# Altium PCB StereoJackToDualDifferential.PcbDoc
Units mm, origin at the board's own origin, x right, y up, seen from the top; angles counter-clockwise.
Board outline 44.45 x 63.5 mm, 2 copper layers (Top Layer, Bottom Layer); 30 components, 22 nets, 85 pads, 8 vias.
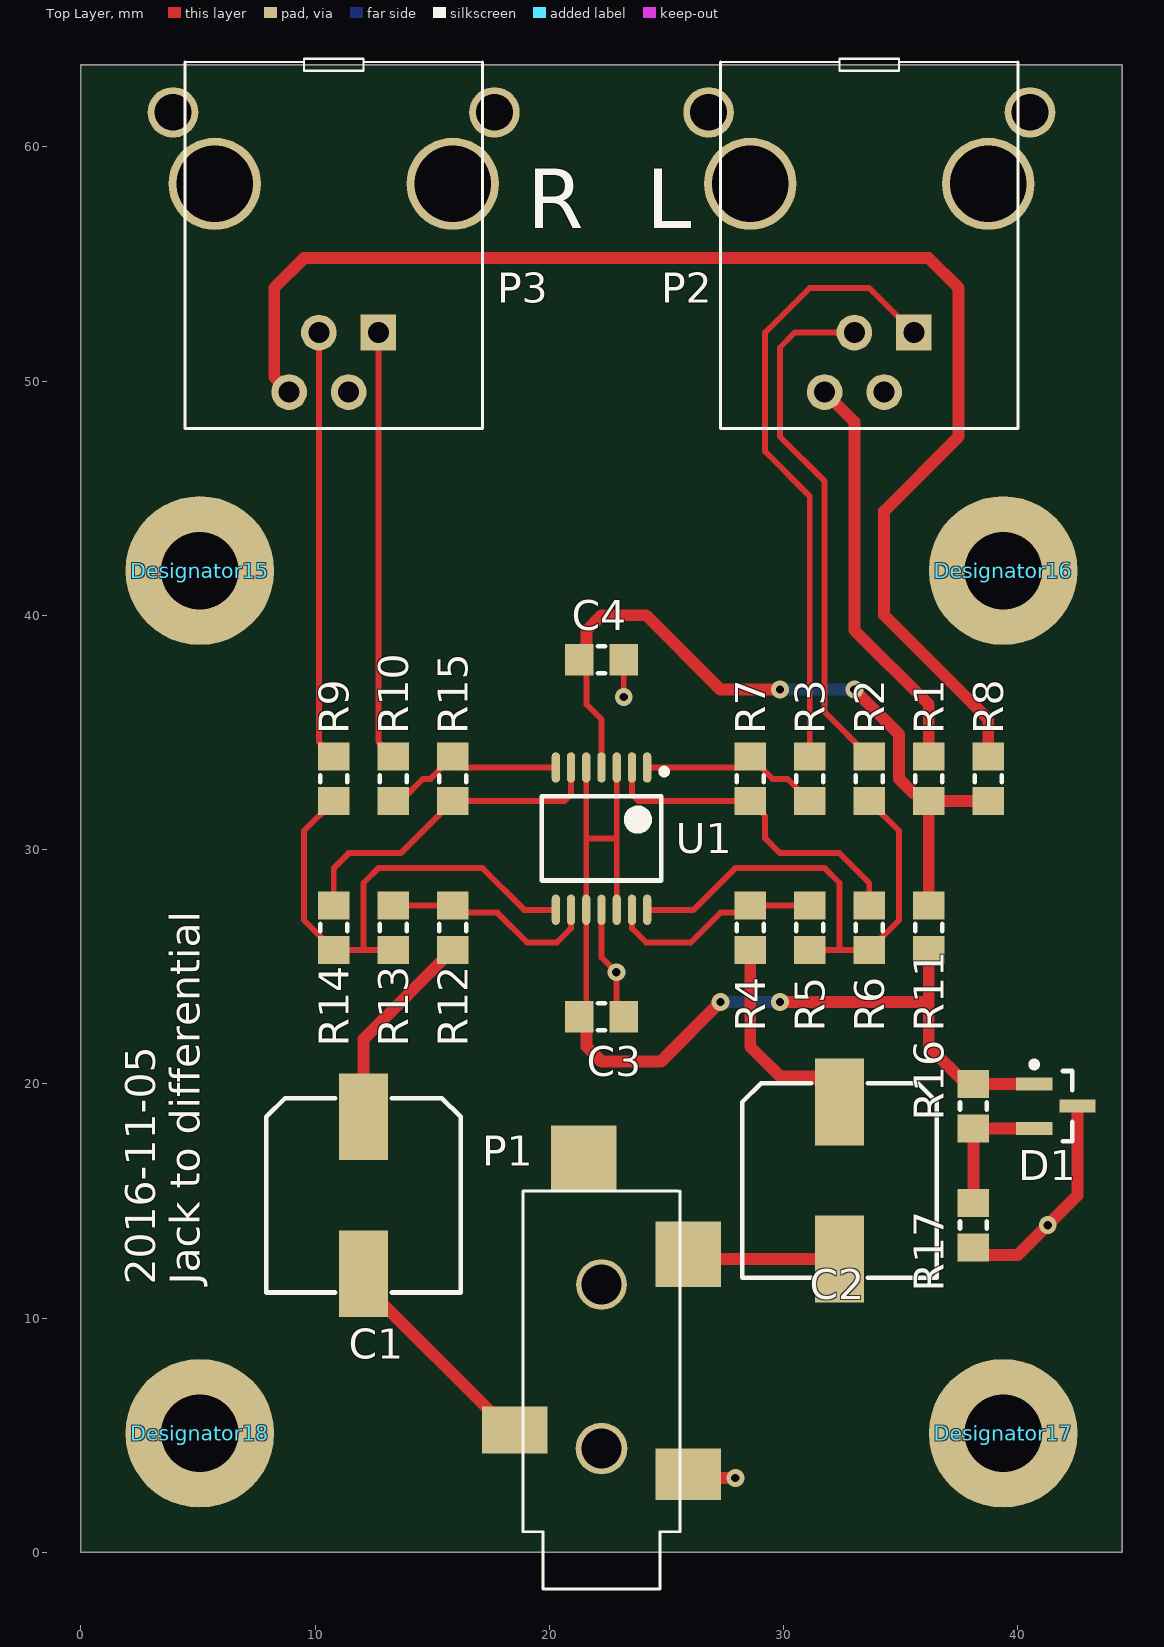
[diagram p0: Top Layer view]
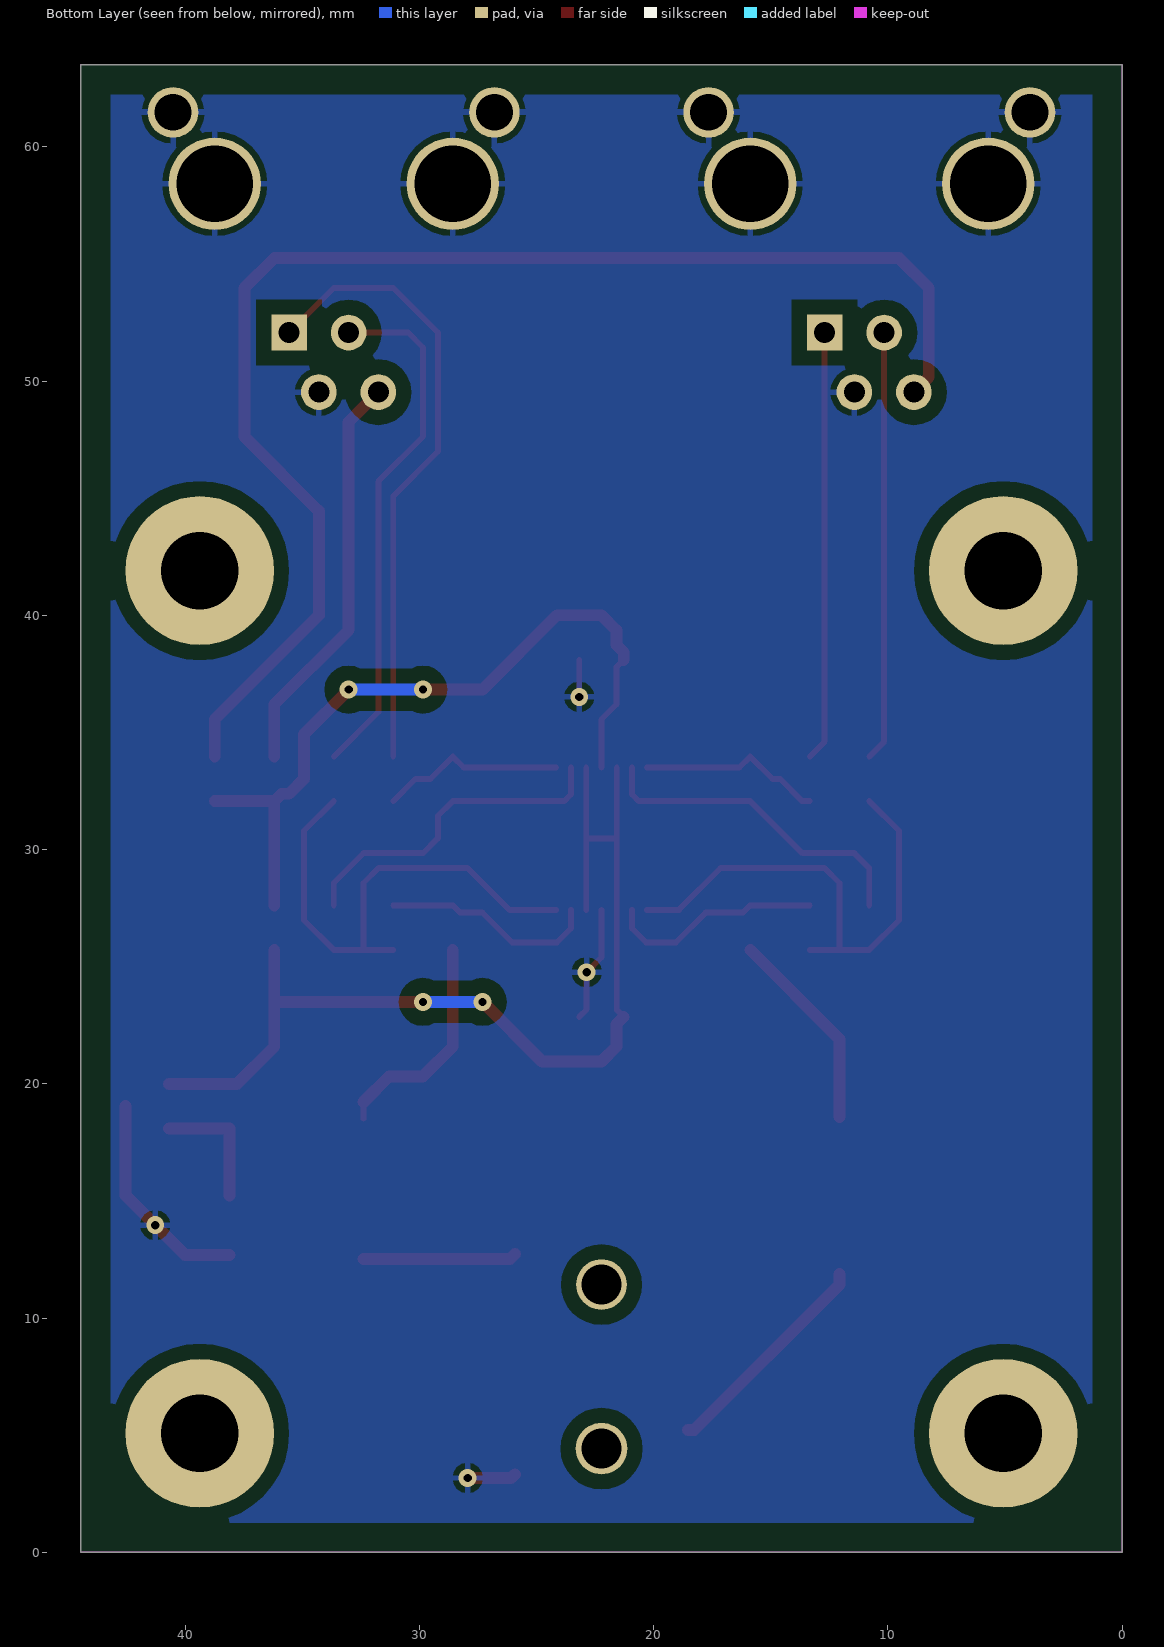
[diagram p1: Bottom Layer view, seen from below]

## Layer stack, top to bottom
Top Solder: solder mask 0.0102, Solder Resist, Dk 3.5
Top Layer: signal copper 0.0356
Dielectric 1: dielectric 0.32, FR-4, Dk 4.8
Bottom Layer: signal copper 0.0356
Bottom Solder: solder mask 0.0102, Solder Resist, Dk 3.5

## Board outline
0,0 44.45,0 44.45,63.5 0,63.5

## Design rules (kind name [scope] priority, off if disabled: settings)
Clearance Clearance_1 [InPoly] p1: gap=0.635
Clearance [All] p2: gap=0.203
PolygonConnect [All] p1: connectstyle=Relief reliefconductorwidth=0.254 reliefentries=4 polygonreliefangle="90 Angle" airgapwidth=0.254
RoomDefinition StereoJackToDualDifferential [InComponentClass('StereoJackToDualDifferential')] p1: confinementstyle=ConfineIn formatcopy=TRUE lockcomponents=FALSE outline 84.328,-36.703 254,-36.703 254,-13.716 84.328,-13.716
RoutingVias [All] p1: holewidth=0.711 width=1.27 viastyle="Through Hole" minholewidth=0.711 minwidth=1.27 maxholewidth=0.711 maxwidth=1.27
SolderMaskExpansion [All] p1: expansion=0.102
Width [All] p1: maxlimit=1.27 minlimit=0.254 preferedwidth=0.508 minimp=50.000000 maximp=50.000000 favimp=50.000000
29 further rules are at their usual default settings.

## Classes and differential pairs
component class StereoJackToDualDifferential: C1 C2 C3 C4 D1 P1 P2 P3 R1 R2 R3 R4 R5 R6 R7 R8 R9 R10 R11 R12 R13 R14 R15 R16 R17 U1

## Components (designator, comment, footprint, x,y, rotation, side; value= is the part's Value field where it differs from the comment)
C1 "Capacitor_Polarized" CAP_RAD_SMD_DIA315 12.065,15.24 r270 top
C2 "Capacitor_Polarized" CAP_RAD_SMD_DIA315 32.385,15.875 r270 top
C3 "Capacitor" 0805 22.225,22.86 r0 top
C4 "Capacitor" 0805 22.225,38.1 r0 top
D1 "TL431" SOT23_132 41.62,19.05 r0 top
Designator15 "Comment" SCREW_4_40 5.08,41.91 r0 top
Designator16 "Comment" SCREW_4_40 39.37,41.91 r0 top
Designator17 "Comment" SCREW_4_40 39.37,5.08 r0 top
Designator18 "Comment" SCREW_4_40 5.08,5.08 r0 top
P1 "CON_AUDIO_3.5mm_TRS_ALT1" "CONN_3.5mm_CUI 3523-SMT" 22.225,-0.07 r90 top
P2 "CON6_5555140-2" CONN4_5555140-2 33.655,58.42 r180 top
P3 "CON6_5555140-2" CONN4_5555140-2 10.795,58.42 r180 top
R1 "Resistor" 0805 36.195,33.02 r270 top
R2 "Resistor" 0805 33.655,33.02 r90 top
R3 "Resistor" 0805 31.115,33.02 r90 top
R4 "Resistor" 0805 28.575,26.67 r270 top
R5 "Resistor" 0805 31.115,26.67 r90 top
R6 "Resistor" 0805 33.655,26.67 r90 top
R7 "Resistor" 0805 28.575,33.02 r90 top
R8 "Resistor" 0805 38.735,33.02 r270 top
R9 "Resistor" 0805 10.795,33.02 r90 top
R10 "Resistor" 0805 13.335,33.02 r90 top
R11 "Resistor" 0805 36.195,26.67 r90 top
R12 "Resistor" 0805 15.875,26.67 r270 top
R13 "Resistor" 0805 13.335,26.67 r90 top
R14 "Resistor" 0805 10.795,26.67 r90 top
R15 "Resistor" 0805 15.875,33.02 r90 top
R16 "Resistor" 0805 38.1,19.05 r90 top
R17 "Resistor" 0805 38.1,13.97 r90 top
U1 "OPA_QUAD" TSSOP14 22.225,30.48 r270 top

## Footprints (in the part's own frame and the unit in brackets; to place one, negate y for a bottom-side part, rotate by r counter-clockwise, add the part's x,y. Pads: shape width x height; smd on the part's side, far side on the other; paste and mask are expansions set on the pad)
0805 [mm] "Chip Resistor, 2-Leads, Body 2,0x1,3mm, IPC Medium Density"
  rect 1.2x1.35 smd: 1(-0.95,0) 2(0.95,0)
  silkscreen extent -0.15,-0.58 0.15,0.58, body extent -1.1,-0.67 1.1,0.67, height 0.65
CAP_RAD_SMD_DIA315 [mm] "Aluminum Electrolytic Capacitor, 8mm diameter"
  rect 3.7x2.1 smd: +(-3.35,0) -(3.35,0)
  silkscreen extent -4.15,-4.15 4.15,4.15, body extent -3.97,-3.99 4,3.99, height 6
CONN4_5555140-2 [mil] "5555140-2 (shielded) ou 5555165-2 (unshielded)"
  rect 60x60 hole 35.04 mask+4.72: 1(-75,250)
  round 60 hole 35.04 mask+4.72: 2(-25,350) 3(25,250) 4(75,350)
  round 85 hole 61.81 mask+4.72: M(-270.08,-120.08) M(270.08,-120.08)
  round 155 hole 127.95 mask+4.72: M(-200,0) M(200,0)
  silkscreen extent -250,-210 250,411, body extent -309,-320 311,409, height 537
"CONN_3.5mm_CUI 3523-SMT" [mm] "Right-angle, surface-mounted 3.5mm connector TRRS"
  rect 2.2x2.8 smd mask+0.12: 1(3.4,-3.7)
  rect 2.8x2.8 smd mask+0.12: 2(12.8,-3.7) 4(16.9,0.75)
  rect 2x2.8 smd mask+0.12: 3(5.3,3.7)
  rrect100% 2.2x2.2 hole 1.7 mask+0.02: ""(4.5,0)
  rrect100% 2.159x2.159 hole 1.7 mask+0.02: ""(11.5,0)
  silkscreen extent -1.5,-3.35 15.5,3.35, body extent -1.5,-4.5 15.5,4.5, height 5
SCREW_4_40 [mil]
  rrect100% 250x250 hole 130 mask+0.79: 1(0,0)
SOT23_132 [mm] "SOT23, 3-Leads, Body 3,0x2,6mm (max), Pitch 0,95mm, IPC Medium Density"
  rect 1.55x0.55 smd: 1(-0.925,0.95) 2(-0.925,-0.95) 3(0.925,0)
  silkscreen extent -1.05,-1.5 0.7,1.9, body extent -0.7,-1.5 0.7,1.5, height 1.2
TSSOP14 [mm]
  oval 1.3x0.35 smd mask+0.06: 1(-3.025,1.95) 2(-3.025,1.3) 3(-3.025,0.65) 4(-3.025,0) 5(-3.025,-0.65) 6(-3.025,-1.3) 7(-3.025,-1.95) 8(3.05,-1.95) 9(3.05,-1.3) 10(3.05,-0.65) 11(3.05,0) 12(3.05,0.65) 13(3.05,1.3) 14(3.05,1.95)
  silkscreen extent -2.97,-2.55 1.8,2.8, body extent -2.25,-2.55 2.25,2.55, height 1.2

## Part data
C1 C2: "Capacitor"
P1: "Audio 3.5mm CUI SJ-3523-SMT-TR"
P2 P3: "6p4c RJ11/RJ14, shielded (5555165-2 unshielded)"
U1: "Quad amplifier (standard)"

## Via types
v1: diameter 0.762, hole 0.356, Top Layer to Bottom Layer, 8 vias

## Nets (pads, with @x,y where several pads share a name; then routed paths per layer and width w, separated by ;. In a path a pad name is that pad's centre, name@x,y a point inside that pad or via, vN(x,y) a via of type N, cw(c..) or ccw(c..) an arc to the next point about the centre after c; other vN are vias at no path point)
+5V: C4.1 R1.2 R8.2 R11.2 U1.4 | length 32.6
  Top Layer w0.254: C4.1 21.59,37.785 21.59,36.195 22.225,35.56 U1.4
  Top Layer w0.508: C4.1 21.275,38.42 21.59,38.735 21.59,39.37 22.225,40.005 24.13,40.005 27.305,36.83 v1(29.845,36.83) ; v1(33.02,36.83) 34.925,34.925 34.925,33.02 35.56,32.385 35.88,32.385 R1.2 ; R11.2 R1.2 ; R8.2 R1.2
  Bottom Layer w0.508: v1(29.845,36.83) v1(33.02,36.83)
GND: C3.2 C4.2 D1.3 P1.1 P2.2 P2.M P3.2 P3.M R17.1 U1.11 | length 17.9
  Top Layer w0.254: U1.11 22.225,25.4 v1(22.86,24.765) 22.86,23.175 C3.2 ; v1(23.175,36.515) C4.2
  Top Layer w0.508: P1.1 26.08,3.175 v1(27.94,3.175) ; R17.1@38.1,12.7 40.005,12.7 42.545,15.24 D1.3
  other v1: 41.275,13.97
LEFT_IN: C2.+ R4.2 | length 9.5
  Top Layer w0.254: C2.+@32.385,18.51 C2.+@32.385,19.05
  Top Layer w0.508: R4.2 28.575,21.59 29.845,20.32 31.29,20.32 C2.+
NetC1_-: C1.- P1.3 | length 9.5
  Top Layer w0.508: C1.- 12.065,11.43 18.265,5.23 P1.3
NetC2_-: C2.- P1.2 | length 6.5
  Top Layer w0.508: P1.2 26.13,12.525 C2.-
NetD1_2: D1.2 R16.1 R17.2 | length 5.5
  Top Layer w0.508: R17.2@38.1,15.235 R16.1 D1.2
NetP2_1: P2.1 R3.2 | length 26.8
  Top Layer w0.254: R3.2 31.115,45.085 29.21,46.99 29.21,52.07 31.115,53.975 33.655,53.975 P2.1
NetP2_3: P2.3 R2.2 | length 22.5
  Top Layer w0.254: P2.3 30.48,52.07 29.845,51.435 29.845,47.625 31.75,45.72 31.75,35.875 R2.2
NetP2_4: P2.4 R1.1 | length 17.4
  Top Layer w0.508: P2.4 33.02,48.26 33.02,39.37 36.195,36.195 R1.1
NetP3_1: P3.1 R10.2 | length 18.4
  Top Layer w0.254: P3.1 12.7,34.605 R10.2
NetP3_3: P3.3 R9.2 | length 18.4
  Top Layer w0.254: P3.3 10.16,34.605 R9.2
NetP3_4: P3.4 R8.1 | length 58.1
  Top Layer w0.508: P3.4 8.255,50.165 8.255,53.975 9.525,55.245 36.195,55.245 37.465,53.975 37.465,47.625 34.29,44.45 34.29,40.005 38.735,35.56 R8.1
NetR2_1: R2.1 R5.1 R6.1 U1.14 | length 22
  Top Layer w0.254: U1.14 26.16,27.43 27.94,29.21 31.75,29.21 32.385,28.575 32.385,25.72 ; R5.1 32.385,25.72 ; R2.1 34.925,30.8 34.925,26.99 R6.1 32.385,25.72
NetR3_1: R3.1 R7.2 U1.1 | length 7.9
  Top Layer w0.254: U1.1 28.11,33.505 R7.2 29.525,33.02 30.165,33.02 R3.1
NetR4_1: R4.1 R5.2 U1.13 | length 9.3
  Top Layer w0.254: U1.13 23.525,26.64 24.13,26.035 26.035,26.035 27.305,27.305 28.26,27.305 R4.1 R5.2
NetR6_2: R6.2 R7.1 U1.2 | length 14.4
  Top Layer w0.254: U1.2 23.525,32.355 23.81,32.07 R7.1 29.21,31.435 29.21,30.48 29.845,29.845 32.385,29.845 33.655,28.575 R6.2
NetR9_1: R9.1 R13.1 R14.1 U1.8 | length 22
  Top Layer w0.254: R9.1 9.525,30.8 9.525,26.99 R14.1 12.065,25.72 ; R13.1 12.065,25.72 ; U1.8 18.925,27.43 17.145,29.21 12.7,29.21 12.065,28.575 12.065,25.72
NetR10_1: R10.1 R15.2 U1.7 | length 7.9
  Top Layer w0.254: R10.1 13.655,32.07 14.605,33.02 14.925,33.02 R15.2 16.34,33.505 U1.7
NetR12_1: R12.1 R13.2 U1.9 | length 9.3
  Top Layer w0.254: R13.2 R12.1 16.19,27.305 17.78,27.305 19.05,26.035 20.32,26.035 20.925,26.64 U1.9
NetR14_2: R14.2 R15.1 U1.6 | length 14.2
  Top Layer w0.254: R14.2 10.795,29.21 11.43,29.845 13.65,29.845 R15.1 20.64,32.07 20.925,32.355 U1.6
RIGHT_IN: C1.+ R12.2 | length 8.7
  Top Layer w0.508: C1.+ 12.065,21.91 R12.2
VREF: C3.1 D1.1 R11.1 R16.2 U1.3 U1.5 U1.10 U1.12 | length 45.1
  Top Layer w0.254: C3.1 21.575,23.16 U1.10 21.575,30.48 ; U1.5 21.575,30.48 ; U1.12 22.875,30.48 ; U1.3 22.875,30.48 ; 21.575,30.48 22.875,30.48
  Top Layer w0.508: C3.1 21.59,22.545 21.59,21.59 22.225,20.955 24.765,20.955 v1(27.305,23.495) ; v1(29.845,23.495) 36.195,23.495 ; R11.1 36.195,23.495 ; R16.2 R16.2@37.785,20 ; D1.1 R16.2@37.785,20 ; 36.195,23.495 36.195,21.59 R16.2@37.785,20
  Bottom Layer w0.508: v1(27.305,23.495) v1(29.845,23.495)
pads on no net: Designator15.1 Designator16.1 Designator17.1 Designator18.1 P1. P1.4

## Polygon pours and split planes (outlines as drawn)
GND on Bottom Layer "GND" (solid, remove dead copper, pour order 2): 1.27,62.23 43.18,62.23 43.18,1.27 1.27,1.27

## Keep-outs
Keep-Out Layer:
  the board outline again, w0.025

## Silkscreen, mask and mechanical layers (free items; w line width, h text height)
Top Overlay:
  text "R" at 19.05,56.515 h2.54
  text "L" at 24.13,56.515 h2.54
  text "2016-11-05" at 3.175,11.43 h1.27 r90
  text "Jack to differential" at 5.08,11.43 h1.27 r90